# EAGLE board oldt-rex (EAGLE 9.6.2)
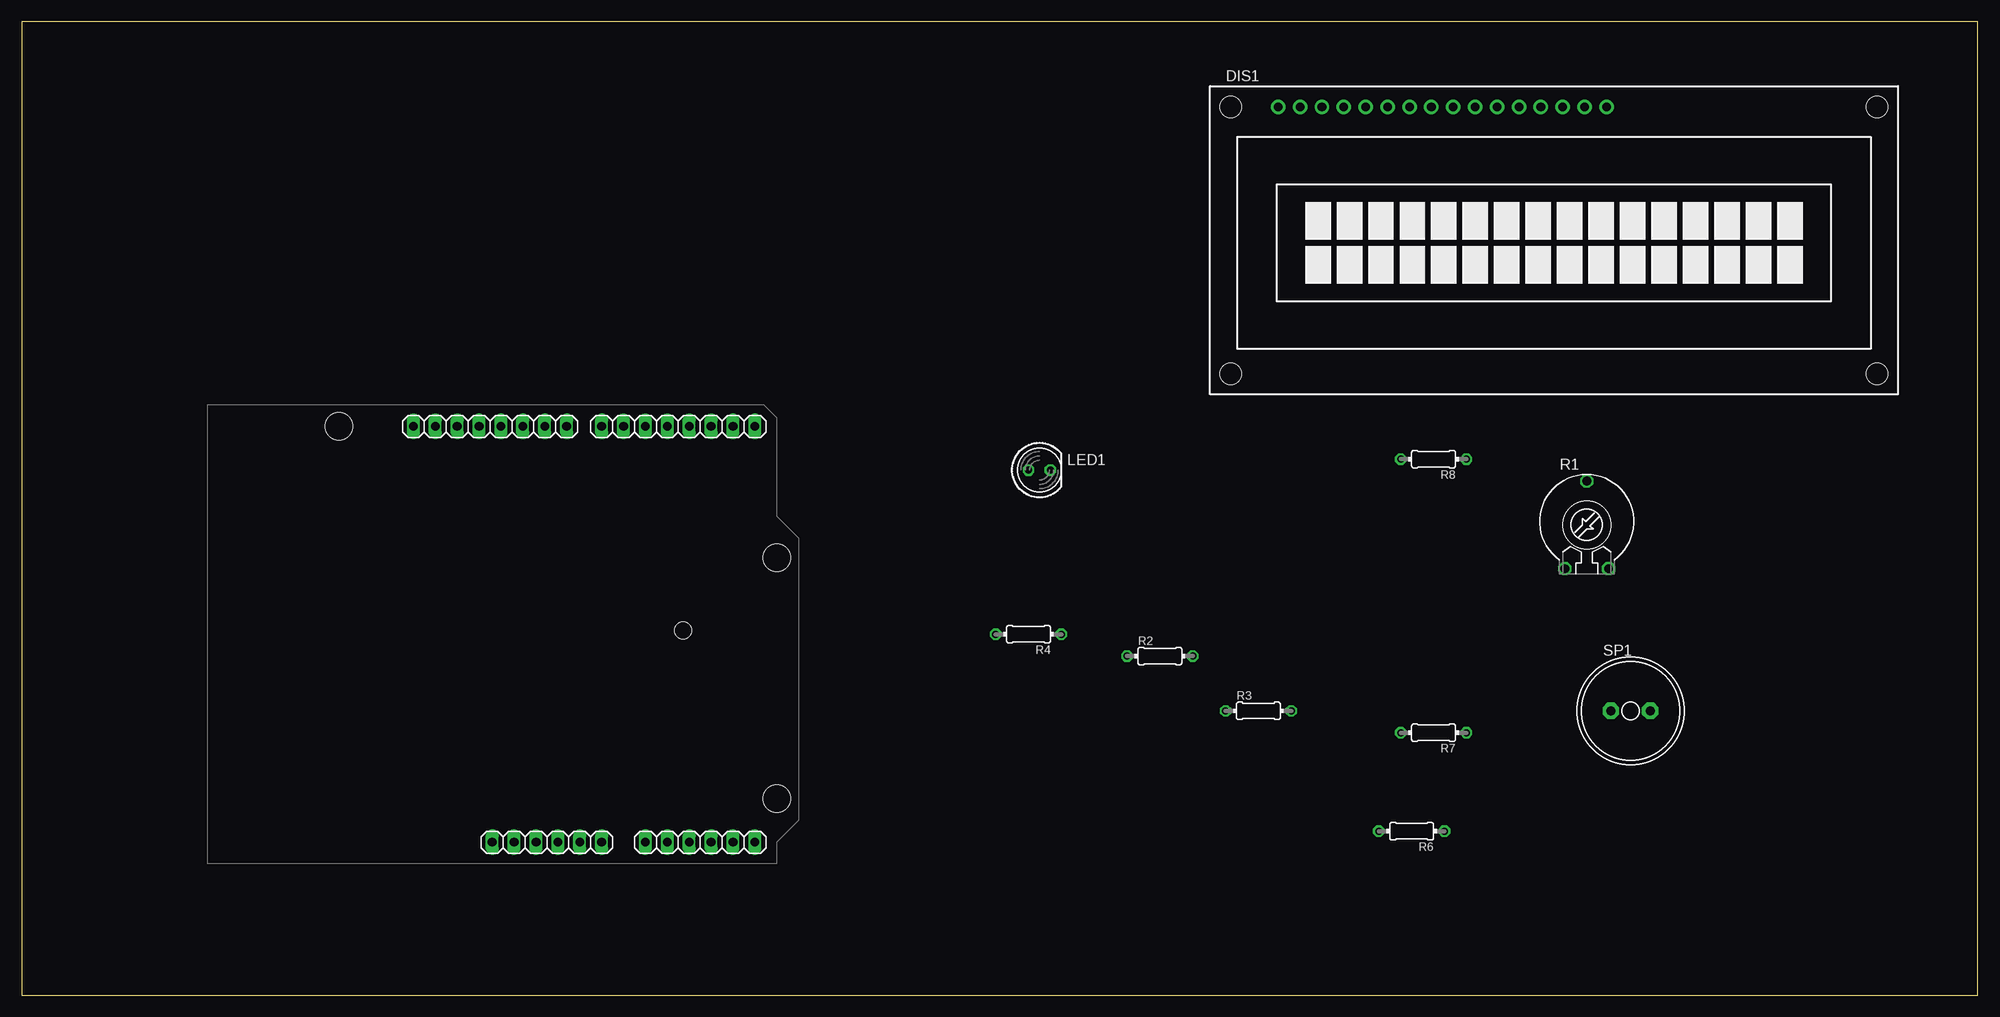
[diagram p0: board, top side]
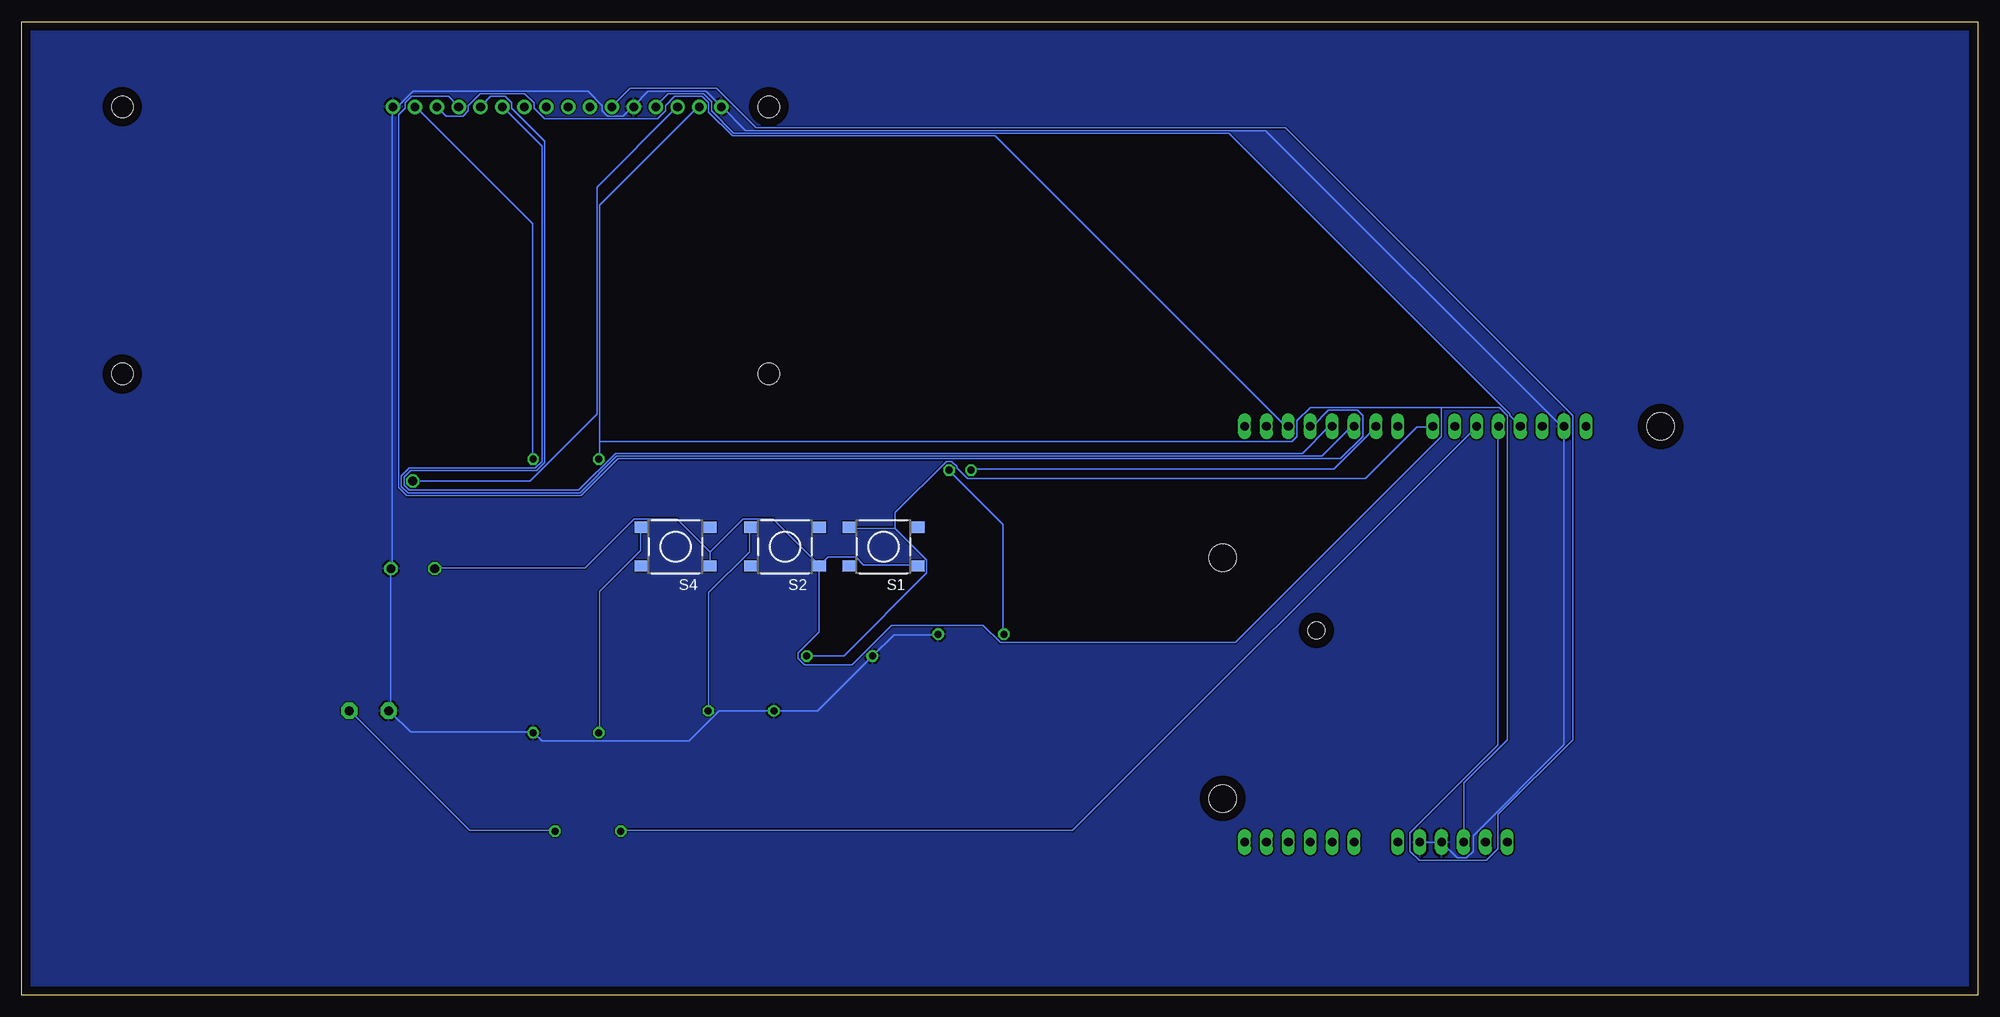
[diagram p1: board, bottom side, seen from below]

Size 227 x 113.02 mm. Coordinates in mm from the lower left corner, seen from the top.
Outline: 0,0 227,0 227,113.02 0,113.02 0,0
Copper layers (1*16): Top 0.035mm / dielectric 1.5mm / Bottom 0.035mm
Design rules "default": minimum track width 6mil, minimum drill 0.35mm, track to track 6mil, track to pad 6mil, pad to pad 6mil, via to via 6mil, smd to smd 6mil, copper to edge 40mil, drill to drill 6mil, minimum pad ring 10mil, minimum via ring 8mil, stop-mask expansion 4mil, vias tented up to drill 0mil, thermal gap 10mil

## Footprints (pad centres in the part's own frame; a part is rotated, then mirrored left to right if it is on the bottom)
TUXGR_16X2_R2 = drill 1 pad 1.676: 1 -32,15.5; 2 -29.46,15.5; 3 -26.92,15.5; 4 -24.38,15.5; 5 -21.84,15.5; 6 -19.3,15.5; 7 -16.76,15.5; 8 -14.22,15.5; 9 -11.68,15.5; 10 -9.14,15.5; 11 -6.6,15.5; 12 -4.06,15.5; 13 -1.52,15.5; 14 1.02,15.5; 15 3.56,15.5; 16 6.1,15.5 | hole 2.5: -37.5,-15.5; 37.5,-15.5; -37.5,15.5; 37.5,15.5
ARDUINO2009 = drill 1.016 long: 1 33.02,2.54; 2 35.56,2.54; 3 38.1,2.54; 4 40.64,2.54; 5 43.18,2.54; 6 45.72,2.54; 7 50.8,2.54; 8 53.34,2.54; 9 55.88,2.54; 10 58.42,2.54; 11 60.96,2.54; 12 63.5,2.54; 13 63.5,50.8; 14 60.96,50.8; 15 58.42,50.8; 16 55.88,50.8; 17 53.34,50.8; 18 50.8,50.8; 19 48.26,50.8; 20 45.72,50.8; 21 41.656,50.8; 22 39.116,50.8; 23 36.576,50.8; 24 34.036,50.8; 25 31.496,50.8; 26 28.956,50.8; 27 26.416,50.8; 28 23.876,50.8 | hole 3.2: 15.24,50.8; 66.04,35.56; 66.04,7.62 | hole 2: 55.17,27.114
LED5MM = drill 0.813 octagon: A -1.27,0; K 1.27,0
PT-10 = drill 1.016 octagon: A -2.54,-5.08; E 2.54,-5.08; S 0,5.08
0204/7 = drill 0.813 octagon: 1 -3.81,0; 2 3.81,0
DTSM-6 = smd 1.55 x 1.3: 1 -3.975,2.25; 2 3.975,2.25; 3 -3.975,-2.25; 4 3.975,-2.25
AL11P = drill 1.016 pad 1.905 octagon: + 2.286,0; - -2.286,0

## Placement (x,y rotation side)
DIS1  TUXGR_16X2_R2  [TUXGR_16X2_R2]  177.8,87.63 0 top
IC1  [ARDUINO2009]  21.59,15.24 0 top
LED1  [LED5MM]  118.11,60.96 0 top
R1  10k  [PT-10]  181.61,54.61 0 top
R2  100k  [0204/7]  132.08,39.37 0 top
R3  100k  [0204/7]  143.51,33.02 0 top
R4  200  [0204/7]  116.84,41.91 180 top
R6  1k  [0204/7]  161.29,19.05 180 top
R7  100k  [0204/7]  163.83,30.48 180 top
R8  200  [0204/7]  163.83,62.23 180 top
S1  DTSM-6  [DTSM-6]  127,52.07 180 bottom
S2  DTSM-6  [DTSM-6]  138.43,52.07 180 bottom
S4  DTSM-6  [DTSM-6]  151.13,52.07 180 bottom
SP1  AL11P  [AL11P]  186.69,33.02 0 top

## Library data of the parts
DIS1 = display-lcd; OC_FARNELL: unknown; OC_NEWARK: unknown
IC1 = arduino
LED1 = led
R1 = pot
R2-R4 R6-R8 = rcl; SPICEPREFIX: R
S1 S2 S4 = switch-tact
SP1 = buzzer; OC_FARNELL: unknown; OC_NEWARK: unknown

## Nets
+3V3: IC1.2
BUT_L: R7.2 S4.4
BUT_M: IC1.21 R2.2 S1.4
BUT_R: R3.2 S2.4
BUZ: IC1.23 R6.2
GND: DIS1.1 DIS1.5 DIS1.16 IC1.4 IC1.5 IC1.27 R1.E R2.1 R3.1 R4.1 R7.1 SP1.-
N$1: DIS1.14 IC1.15
N$2: DIS1.13 IC1.16
N$3: DIS1.12 IC1.17
N$4: IC1.19 LED1.A
N$5: DIS1.11 IC1.18
N$6: LED1.K R4.2
N$7: R6.1 SP1.+
N$8: DIS1.15 R8.1
PIN11: DIS1.6 IC1.24
PIN12: DIS1.4 IC1.25
POT: DIS1.3 R1.S
POW: DIS1.2 IC1.3 R1.A R8.2 S1.1 S2.1 S4.1

## Tracks (layer width: path | path; a pad name or v marks a point on that pad's centre or on a via)
BUT_L
  Bottom 0.152: S4.4 155.19,54.2 155.19,51.61 159.92,46.89 159.92,30.58 R7.2
BUT_M
  Bottom 0.152: 125.63,54.2 130.96,54.2 S1.4 | 125.63,54.2 121.97,50.55 121.97,49.02 131.57,39.42 135.84,39.42 R2.2 | 125.63,54.2 125.63,56.03 119.69,61.98 119.08,61.98 118.47,61.37 118.47,61.21 117.25,59.99 71.07,59.99 65.13,65.94 63.3,65.94 IC1.21
BUT_R
  Bottom 0.152: S2.4 142.55,54.2 142.55,51.46 147.27,46.74 147.27,33.02 R3.2
BUZ
  Bottom 0.152: IC1.23 105.05,19.15 157.48,19.15 R6.2
GND
  Bottom 0.152: IC1.5 IC1.4 60.4,15.95 59.33,15.95 58.57,16.71 58.57,18.54 48.06,29.06 48.06,65.94 IC1.27 48.06,66.09 48.36,66.09 82.65,100.38 143,100.38 145.75,103.12 DIS1.1 145.9,103.28 147.57,104.95 154.28,104.95 155.96,103.28 DIS1.5 156.11,103.12 157.18,102.06 159,102.06 159.61,102.67 159.61,103.28 161.29,104.95 181.56,104.95 183.24,103.28 183.84,103.28 DIS1.16 184,103.12 184,49.78 184.15,49.63 R1.E 184.15,32.87 | R4.1 120.75,41.86 125.78,41.86 R2.1 134.62,33.02 R3.1 146.05,33.02 149.56,29.52 166.62,29.52 167.54,30.43 R7.1 167.69,30.58 181.86,30.58 184.15,32.87 | 184.15,32.87 184.3,33.02 SP1.- 184.15,32.87
  pour Bottom: 0,113.03 0,0 227.33,0 227.33,113.03 226.06,113.03
N$1
  Bottom 0.152: IC1.15 80.06,66.09 80.37,66.09 114.05,99.77 144.53,99.77 147.27,102.51 147.27,103.58 148.03,104.34 151.23,104.34 152.3,103.28 152.3,102.67 153.21,101.75 166.32,101.75 167.54,102.97 167.54,103.58 168.61,104.65 173.79,104.65 175.16,103.28 175.16,102.67 175.77,102.06 177.75,102.06 DIS1.14
N$2
  Bottom 0.152: IC1.16 77.47,66.09 77.16,66.09 75.34,67.92 71.98,67.92 71.37,67.31 71.37,64.87 73.97,62.28 157.78,62.28 162.05,58.01 182.32,58.01 183.24,58.93 183.24,102.21 182.47,102.97 182.47,103.58 181.71,104.34 177.44,104.34 176.38,103.28 DIS1.13
N$3
  Bottom 0.152: IC1.17 75.03,65.94 75.34,65.94 78.38,62.89 158.09,62.89 162.36,58.62 182.02,58.62 182.63,59.23 182.63,60.15 181.86,60.91 167.23,60.91 166.32,61.82 166.32,99.16 170.13,102.97 170.13,103.58 170.89,104.34 172.57,104.34 173.63,103.28 DIS1.12
N$4
  Bottom 0.152: LED1.A 116.79,61.06 74.73,61.06 69.85,65.94 IC1.19
N$5
  Bottom 0.152: IC1.18 72.44,65.94 72.75,65.94 76.1,62.59 157.94,62.59 162.2,58.32 182.17,58.32 182.93,59.08 182.93,60.3 182.02,61.21 167.39,61.21 166.62,61.98 166.62,98.55 DIS1.11
N$6
  Bottom 0.152: R4.2 113.13,42.01 113.13,54.66 119.38,60.91 LED1.K
N$7
  Bottom 0.152: R6.1 165.1,19.15 175.01,19.15 188.87,33.02 SP1.+
N$8
  Bottom 0.152: R8.1 167.69,62.28 167.69,89.56 181.25,103.12 DIS1.15
PIN11
  Bottom 0.152: IC1.24 55.68,65.94 55.68,29.06 65.89,18.85 65.89,16.71 64.82,15.65 57.05,15.65 55.68,17.02 55.68,20.98 46.99,29.67 46.99,67.31 80.37,100.69 141.78,100.69 146.36,105.26 156.41,105.26 158.39,103.28 DIS1.6
PIN12
  Bottom 0.152: IC1.25 53.09,66.09 54.3,67.31 54.3,67.46 86.92,100.08 144.37,100.08 146.96,102.67 146.96,103.73 147.88,104.65 151.99,104.65 153.37,103.28 DIS1.4
POT
  Bottom 0.152: R1.S 168,59.69 160.22,67.46 160.22,93.83 150.93,103.12 DIS1.3
POW
  Bottom 0.152: S1.1 123.04,49.94 129.29,49.94 130.2,50.85 133.4,50.85 134.31,49.94 S2.1 | 147.12,51.46 147.12,49.94 S4.1 | 147.12,51.46 143.31,55.27 139.8,55.27 134.47,49.94 S2.1 | 147.12,51.46 150.93,55.27 155.96,55.27 161.59,49.63 178.97,49.63 R1.A | 159.92,64.26 159.92,91.69 148.49,103.12 DIS1.2 | 159.92,64.26 159.92,62.28 R8.2 | 62.23,68.22 77.47,68.22 78.99,66.7 78.99,64.87 79.6,64.26 159.92,64.26 | 62.23,68.22 55.52,68.22 54.61,67.31 54.61,29.67 59.64,24.64 59.64,17.78 IC1.3 | 62.23,68.22 62.23,64.87 86.16,40.95 113.44,40.95 115.42,42.93 126.09,42.93 130.66,38.35 136.14,38.35 136.91,39.12 136.91,39.73 134.47,42.16 134.47,49.78 S2.1